# Altium PCB amigaDIP48_v0.8_skinny_willoe_2025-07-20.pcbdoc
Units mm, origin at the board's own origin, x right, y up, seen from the top; angles counter-clockwise.
Board outline 92.9 x 46.99 mm, 2 copper layers (Top Layer, Bottom Layer); 44 components, 81 nets, 277 pads, 151 vias.
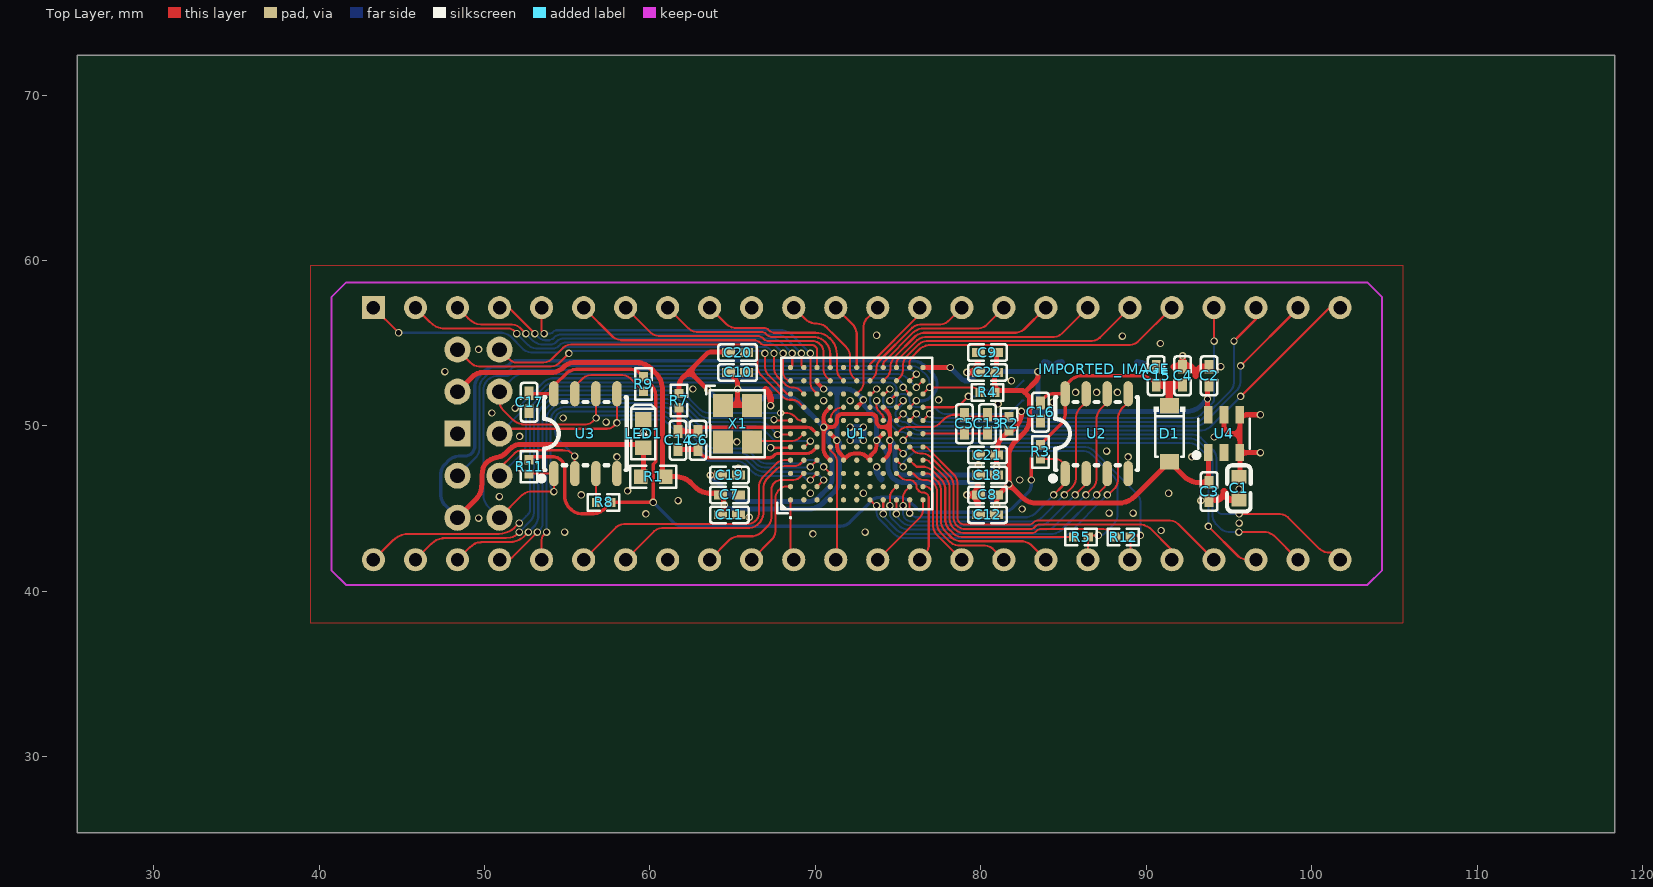
[diagram p0: Top Layer view]
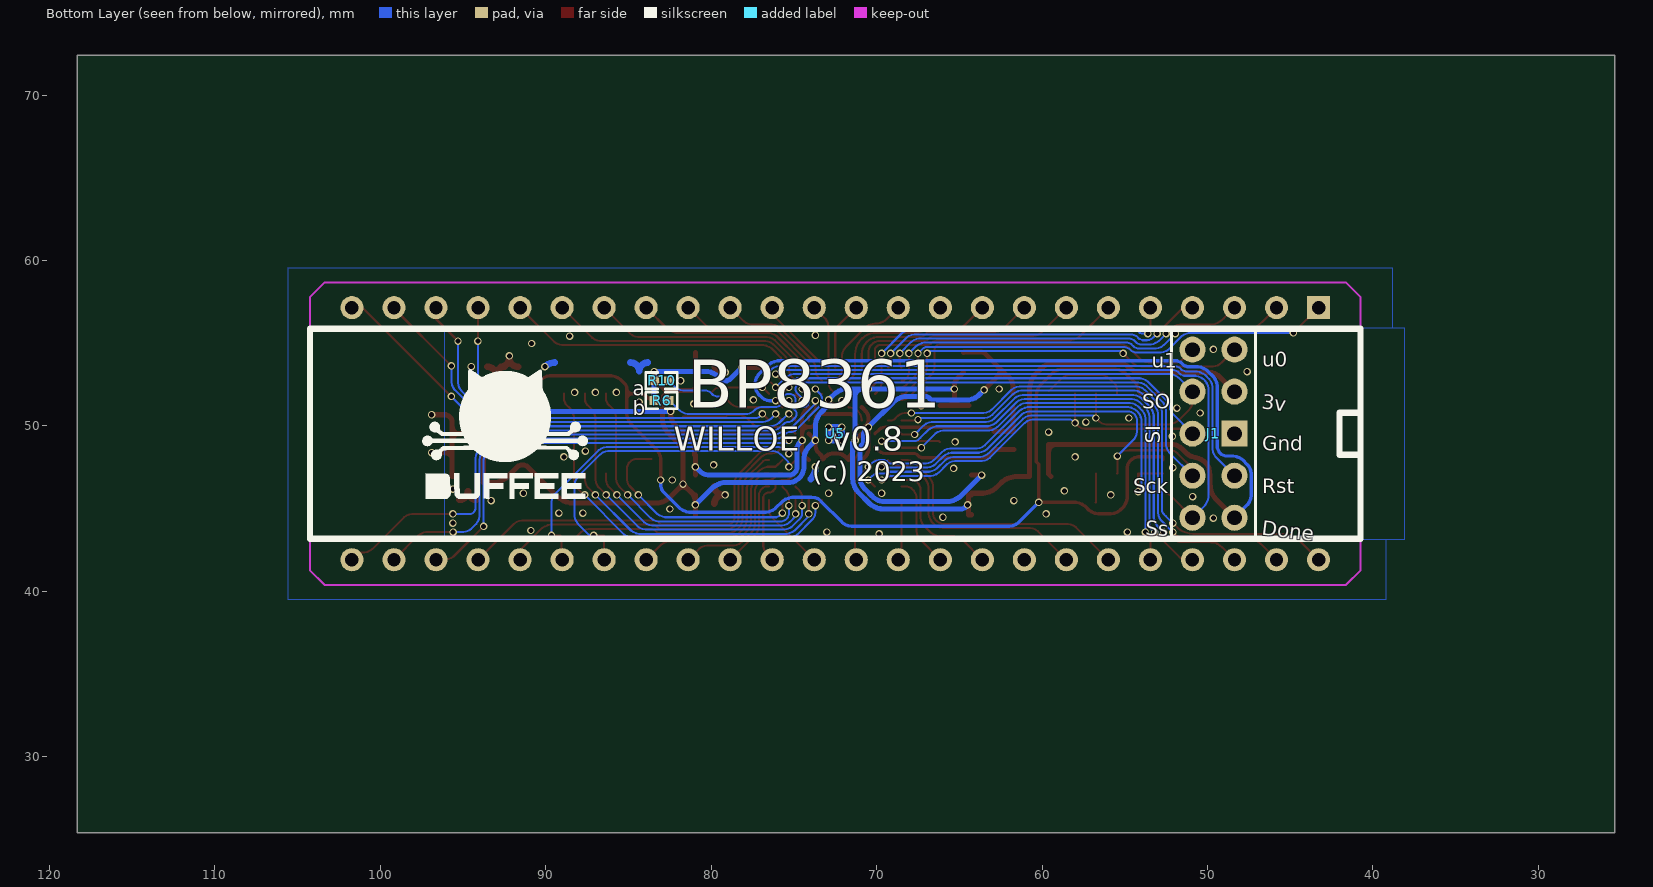
[diagram p1: Bottom Layer view, seen from below]

## Layer stack, top to bottom
Top Layer: signal copper (thickness not stored)
Dielectric: dielectric 0.32, FR-4, Dk 4.8
Bottom Layer: signal copper (thickness not stored)

## Board outline
118.3,25.4 25.4,25.4 25.4,72.39 118.3,72.39

## Components (designator, comment, footprint, x,y, rotation, side; value= is the part's Value field where it differs from the comment)
C1 "4.7u" C0603 95.6,46.23 r90 top
C2 "4.7u" C0402 93.8,53.03 r270 top
C3 "4.7u" C0402 93.8,46.03 r90 top
C4 "4.7u" C0402 92.2,53.03 r270 top
C5 "4.7u" C0402 79,50.13 r90 top
C6 "4.7u" C0402 62.9,49.13 r90 top
C7 "100n" C0402 64.8,45.83 r180 top
C8 "100n" C0402 80.4,45.83 r0 top
C9 "100n" C0402 80.4,54.43 r0 top
C10 "100n" C0402 65.3,53.23 r180 top
C11 "100n" C0402 64.8,44.63 r180 top
C12 "100n" C0402 80.4,44.63 r0 top
C13 "100n" C0402 80.4,50.13 r90 top
C14 "100n" C0402 61.7,49.13 r90 top
C15 "100n" C0402 90.6,53.03 r270 top
C16 "100n" C0402 83.6,50.83 r90 top
C17 "100n" C0402 52.7,51.43 r90 top
C18 "100n" C0402 80.4,47.03 r0 top
C19 "100n" C0402 64.8,47.03 r180 top
C20 "100n" C0402 65.3,54.43 r180 top
C21 "100n" C0402 80.4,48.23 r0 top
C22 "100n" C0402 80.4,53.23 r0 top
D1 "MBR130" SOD-123_L2.8-W1.8-LS3.7-RD 91.4,49.53 r270 top
IMPORTED_IMAGE "IMPORTED_IMAGE" IMPORTED_IMAGE 87.462,53.42 r0 top
J1 "HDR-M-2.54_2x5" HDR-M-2.54_2X5 49.64,49.53 r270 bottom
LED1 "LED-0603_R" LED0603_RED 59.6,49.53 r90 top
R1 "2K2" R0603 60.2,46.93 r0 top
R2 "100" R0402#1 81.7,50.13 r90 top
R3 "10K" R0402#1 83.6,48.43 r270 top
R4 "10K" R0402#1 80.4,52.03 r180 top
R5 "150K" R0402#1 86.05,43.28 r0 top
R6 "10K" R0402#2 83,51.53 r0 bottom
R7 "100" R0402#1 61.75,51.53 r270 top
R8 "10K" R0402#1 57.2,45.38 r180 top
R9 "10K" R0402#1 59.6,52.53 r270 top
R10 "10K" R0402#2 83,52.73 r0 bottom
R11 "10K" R0402#1 52.7,47.53 r270 top
R12 "150K" R0402#1 88.6,43.28 r0 top
U1 "ICE40HX8K-BG121" CABGA-121_L9.0-W9.0-R11-C11-P0.80-TL 72.5,49.53 r90 top
U2 "IS66WVS4M8BLL-104NLI" SOIC-8_L4.9-W3.9-P1.27-LS6.1-BL 87,49.53 r0 top
U3 "W25X40CLSNIG" SOIC-8_L4.9-W3.9-P1.27-LS6.1-BL 56.1,49.53 r0 top
U4 "AP7312-1233W6-7" SOT-26_L3.0-W1.6-P0.95-LS2.8-BR 94.7,49.53 r270 top
U5 "HDR-M-1.778_2x24_SDIP" DIP-48__600 72.5,49.53 r180 bottom
X1 "100MHz" OSC-SMD_4P-L3.2-W2.5-BL 65.3,50.13 r270 top

## Footprints (in the part's own frame and the unit in brackets; to place one, negate y for a bottom-side part, rotate by r counter-clockwise, add the part's x,y. Pads: shape width x height; smd on the part's side, far side on the other; paste and mask are expansions set on the pad)
C0402 [mm]
  rect 0.79x0.54 smd paste-100 mask+0.051: 1(-0.545,0) 2(0.545,0)
  silkscreen extent -1.17,-0.5 1.17,0.5
C0603 [mm]
  rect 0.8x0.9 smd paste+0 mask+0.051: 1(-0.7,0) 2(0.7,0)
  silkscreen extent -1.41,-0.71 1.39,0.72
CABGA-121_L9.0-W9.0-R11-C11-P0.80-TL [mm]
  round 0.32 smd paste-100 mask+0.051: A1(-4,4) A2(-3.2,4) A3(-2.4,4) A4(-1.6,4) A5(-0.8,4) A6(0,4) A7(0.8,4) A9(2.4,4) A10(3.2,4) A11(4,4) B1(-4,3.2) B2(-3.2,3.2) B3(-2.4,3.2) B4(-1.6,3.2) B5(-0.8,3.2) B6(0,3.2) B7(0.8,3.2) B8(1.6,3.2) B9(2.4,3.2) B10(3.2,3.2) B11(4,3.2) C1(-4,2.4) C2(-3.2,2.4) C3(-2.4,2.4) C4(-1.6,2.4) C5(-0.8,2.4) C6(0,2.4) C8(1.6,2.4) C9(2.4,2.4) C10(3.2,2.4) C11(4,2.4) D1(-4,1.6) D2(-3.2,1.6) D3(-2.4,1.6) D4(-1.6,1.6) D5(-0.8,1.6) D6(0,1.6) D7(0.8,1.6) D8(1.6,1.6) D9(2.4,1.6) D10(3.2,1.6) D11(4,1.6) E1(-4,0.8) E2(-3.2,0.8) E3(-2.4,0.8) E4(-1.6,0.8) E5(-0.8,0.8) E6(0,0.8) E7(0.8,0.8) E8(1.6,0.8) E9(2.4,0.8) E10(3.2,0.8) E11(4,0.8) F1(-4,0) F2(-3.2,0) F3(-2.4,0) F4(-1.6,0) F5(-0.8,0) F6(0,0) F7(0.8,0) F8(1.6,0) F9(2.4,0) F10(3.2,0) F11(4,0) G1(-4,-0.8) G2(-3.2,-0.8) G3(-2.4,-0.8) G4(-1.6,-0.8) G5(-0.8,-0.8) G6(0,-0.8) G7(0.8,-0.8) G8(1.6,-0.8) G9(2.4,-0.8) G10(3.2,-0.8) G11(4,-0.8) GMD(0.8,2.4) GMD(1.6,4) H1(-4,-1.6) H2(-3.2,-1.6) H3(-2.4,-1.6) H4(-1.6,-1.6) H5(-0.8,-1.6) H6(0,-1.6) H7(0.8,-1.6) H8(1.6,-1.6) H9(2.4,-1.6) H10(3.2,-1.6) H11(4,-1.6) J1(-4,-2.4) J2(-3.2,-2.4) J3(-2.4,-2.4) J4(-1.6,-2.4) J5(-0.8,-2.4) J6(0,-2.4) J7(0.8,-2.4) J8(1.6,-2.4) J9(2.4,-2.4) J10(3.2,-2.4) J11(4,-2.4) K1(-4,-3.2) K2(-3.2,-3.2) K3(-2.4,-3.2) K4(-1.6,-3.2) K5(-0.8,-3.2) K6(0,-3.2) K7(0.8,-3.2) K8(1.6,-3.2) K9(2.4,-3.2) K10(3.2,-3.2) K11(4,-3.2) L1(-4,-4) L2(-3.2,-4) L3(-2.4,-4) L4(-1.6,-4) L5(-0.8,-4) L6(0,-4) L7(0.8,-4) L8(1.6,-4) L9(2.4,-4) L10(3.2,-4) L11(4,-4)
  silkscreen extent -5.13,-4.58 4.58,4.8
DIP-48__600 [mil]
  rect 55x55 hole 32 paste+0 mask+2: 1(1150,300)
  round 55 hole 32 paste+0 mask+2: 2(1050,300) 3(950,300) 4(850,300) 5(750,300) 6(650,300) 7(550,300) 8(450,300) 9(350,300) 10(250,300) 11(150,300) 12(50,300) 13(-50,300) 14(-150,300) 15(-250,300) 16(-350,300) 17(-450,300) 18(-550,300) 19(-650,300) 20(-750,300) 21(-850,300) 22(-950,300) 23(-1050,300) 24(-1150,300) 25(-1150,-300) 26(-1050,-300) 27(-950,-300) 28(-850,-300) 29(-750,-300) 30(-650,-300) 31(-550,-300) 32(-450,-300) 33(-350,-300) 34(-250,-300) 35(-150,-300) 36(-50,-300) 37(50,-300) 38(150,-300) 39(250,-300) 40(350,-300) 41(450,-300) 42(550,-300) 43(650,-300) 44(750,-300) 45(850,-300) 46(950,-300) 47(1050,-300) 48(1150,-300)
  silkscreen extent -1250,-250 1250,250
HDR-M-2.54_2X5 [mil]
  round 62 hole 35 paste+0 mask+2: 1(200,50) 2(200,-50) 3(100,50) 4(100,-50) 6(0,-50) 7(-100,50) 8(-100,-50) 9(-200,50) 10(-200,-50)
  rect 62x62 hole 35 paste+0 mask+2: 5(0,50)
  silkscreen extent -250,-100 250,100
IMPORTED_IMAGE [mm]
LED0603_RED [mm]
  rect 0.9x1 smd paste+0 mask+0.051: 1(-0.85,0) 2(0.85,0)
  silkscreen extent -1.54,-0.73 1.75,0.73
OSC-SMD_4P-L3.2-W2.5-BL [mm]
  rect 1.4x1.2 smd paste+0 mask+0.051: 1(-1.1,-0.875) 2(1.1,-0.875) 3(1.1,0.875) 4(-1.1,0.875)
  silkscreen extent -2.29,-1.9 2.03,1.65
R0402#1 [mm]
  rect 0.566x0.54 smd paste-100 mask+0.051: 1(-0.433,0) 2(0.433,0)
  silkscreen extent -0.94,-0.5 0.94,0.5
R0402#2 [mm]
  rect 0.566x0.54 smd paste-100 mask+0.051: 1(0.433,0) 2(-0.433,0)
  silkscreen extent -0.94,-0.5 0.94,0.5
R0603 [mm]
  rect 0.806x0.864 smd paste-100 mask+0.051: 1(-0.753,0) 2(0.753,0)
  silkscreen extent -1.39,-0.66 1.39,0.66
SOD-123_L2.8-W1.8-LS3.7-RD [mm]
  rect 0.95x1.15 smd paste+0 mask+0.051: 1(-1.693,0) 2(1.693,0)
  silkscreen extent -1.63,-0.94 1.41,0.94
SOIC-8_L4.9-W3.9-P1.27-LS6.1-BL [mil]
  oval 22.38x60 smd paste+0 mask+2: 1(-75,-95) 2(-25,-95) 3(25,-95) 4(75,-95) 5(75,95) 6(25,95) 7(-25,95) 8(-75,95)
  silkscreen extent -110,-112 98,87
SOT-26_L3.0-W1.6-P0.95-LS2.8-BR [mm]
  rect 1.04x0.532 smd paste+0 mask+0.051: 1(1.145,-0.95) 2(1.145,0) 3(1.145,0.95) 4(-1.145,0.95) 5(-1.145,0) 6(-1.145,-0.95)
  silkscreen extent -0.9,-1.82 1.45,1.56

## Via types
v1: diameter 0.45, hole 0.305, Top Layer to Bottom Layer, tented both sides, 151 vias

## Nets (pads, with @x,y where several pads share a name; then routed paths per layer and width w, separated by ;. In a path a pad name is that pad's centre, name@x,y a point inside that pad or via, vN(x,y) a via of type N, cw(c..) or ccw(c..) an arc to the next point about the centre after c; other vN are vias at no path point)
+1.2VDC: C2.2 C18.2 C19.2 C20.2 C21.2 R2.1 R7.1 U1.D4 U1.D8 U1.H4 U1.H8 U4.6 | length 68.5
  Top Layer w0.25: 70.501,49.552 cw(c70.878,49.552) 70.878,49.929 cw(c70.878,50.306) 70.501,50.306 ; U1.D4 70.653,48.178 70.578,48.29 70.527,48.415 70.501,48.547 v1(70.501,49.929) ; U1.D8 70.653,50.882 70.578,50.77 70.527,50.645 70.501,50.513 v1(70.501,49.929) ; U1.H4 74.347,48.177 74.422,48.289 74.474,48.413 74.5,48.545 v1(74.5,49.13) 74.5,49.929 ; U1.H8 74.347,50.883 74.422,50.771 74.474,50.647 74.5,50.515 74.5,49.929 ; 74.5,49.552 ccw(c74.123,49.552) 74.123,49.929 ccw(c74.123,50.306) 74.5,50.306 ; v1(70.501,49.929) 71.027,49.929 71.152,49.981 71.249,50.077 71.301,50.203 71.301,50.458 71.352,50.582 71.448,50.677 71.572,50.729 73.428,50.729 73.552,50.677 73.647,50.582 73.699,50.458 73.699,50.203 73.751,50.077 73.847,49.981 73.973,49.929 74.5,49.929
  Top Layer w0.305: R7.1 61.751,52.407 61.784,52.574 61.849,52.731 61.943,52.873 62.375,53.305 ; 62.07,52.999 cw(c62.375,52.694) 62.68,53 ; 62.68,53 cw(c62.986,53.305) 62.68,53.61 ; v1(63.5,52.18) 62.375,53.305 ; v1(63.65,47.03) C19.2 ; C20.2 64.705,54.481 64.049,54.481 63.679,54.481 63.457,54.389 62.375,53.305 ; C18.2 C21.2 80.999,48.23 80.999,48.704 81.034,48.883 81.104,49.052 81.205,49.203 R2.1 81.87,49.698 82.048,49.876 82.195,50.038 82.37,50.338 82.457,50.634 v1@82.449,50.879 ; U4.6 93.699,50.724 93.699,51.631 93.699,52.385 C2.2
  Bottom Layer w0.305: v1(63.5,52.18) 63.872,51.808 64.039,51.696 64.225,51.619 64.423,51.58 66.645,51.58 66.771,51.632 66.867,51.728 66.993,51.781 68.175,51.781 68.302,51.768 68.427,51.743 68.549,51.706 68.667,51.657 68.78,51.597 68.886,51.526 68.984,51.446 v1(70.501,49.929) 70.723,49.707 70.801,49.519 70.801,49.004 70.852,48.879 70.947,48.782 70.999,48.657 70.999,46.953 71.001,46.812 70.994,46.703 70.96,46.574 70.901,46.457 70.826,46.33 70.757,46.243 70.664,46.145 70.285,45.766 70.201,45.68 70.103,45.611 70.011,45.549 69.909,45.505 69.782,45.46 69.628,45.433 69.476,45.431 65.724,45.431 65.598,45.443 65.473,45.468 65.351,45.505 65.233,45.554 65.12,45.614 65.014,45.685 64.916,45.766 v1(63.65,47.03) ; v1@74.499,49.129 74.723,48.907 74.801,48.718 74.801,47.441 74.879,47.253 75.023,47.109 75.211,47.031 80.18,47.031 80.345,47.064 80.501,47.128 80.641,47.221 v1(80.95,47.53) ; v1(82.45,50.88) 92.546,50.88 92.793,50.929 93.026,51.026 93.236,51.166 v1(93.7,51.63)
+3.0VDC: C4.2 C15.2 C16.2 C17.2 D1.1 R3.1 R8.1 R9.1 R11.1 U2.8 U3.8 | length 72.1
  Top Layer w0.203: R11.1 52.701,48.131 54.204,48.131 54.41,48.085 54.575,47.982 54.671,47.896 54.78,47.757 54.829,47.636 54.842,47.506 54.849,47.373 54.849,45.664 54.89,45.459 54.97,45.266 55.087,45.092 55.262,44.918 55.436,44.802 55.63,44.722 55.835,44.681 56.597,44.681 56.802,44.722 56.996,44.802 57.17,44.918 57.396,45.143 57.57,45.259 57.763,45.339 57.968,45.38 60.199,45.38 60.201,47.681 60.351,47.831 60.351,51.875 60.31,52.08 60.23,52.273 60.114,52.447 59.599,52.962 59.31,53.251 59.179,53.338 59.034,53.398 58.88,53.429 55.535,53.429 55.33,53.388 55.137,53.308 54.963,53.192 54.283,52.514 54.194,52.3 54.194,52.084 54.053,51.943 52.701,51.943 C17.2 ; 59.869,45.38 ccw(c59.869,45.71) 60.199,45.71 ; v1(83.05,46.73) 83.051,48.018 83.087,48.199 83.158,48.369 83.26,48.523 R3.1 84.859,50.121 84.975,50.295 85.055,50.488 85.096,50.693 U2.8 ; C16.2 83.6,51.481 83.886,51.767 84.015,51.853 84.159,51.913 84.311,51.943 U2.8 ; U2.8@85.096,51.613 ccw(c84.766,51.613) 84.766,51.943 ccw(c84.766,52.273) U2.8@85.096,52.273 ; C15.2 90.262,52.822 90.109,52.924 89.94,52.994 89.759,53.03 86.026,53.03 85.827,52.991 85.639,52.913 85.47,52.8 85.184,52.514 85.096,52.3 U2.8
  Top Layer w0.457: C15.2 91.4,52.484 ; C15.2@90.816,52.484 cw(c90.816,51.9) 91.4,51.9 cw(c91.984,51.9) C4.2@91.984,52.484 ; D1.1 91.4,52.484 ; C4.2 91.4,52.484
  Bottom Layer w0.203: v1(60.2,45.38) 61.412,44.167 61.586,44.05 61.779,43.97 61.984,43.929 71.514,43.929 71.72,43.97 71.913,44.05 72.087,44.166 73.363,45.442 73.537,45.597 73.698,45.655 73.935,45.679 75.114,45.679 75.319,45.639 75.512,45.559 75.686,45.443 76.113,45.017 76.287,44.901 76.481,44.821 76.686,44.78 81.314,44.78 81.519,44.821 81.712,44.901 81.886,45.017 82.902,46.031 82.975,46.14 83.025,46.261 83.051,46.39 v1(83.05,46.73)
+3.3VDC: C3.2 C7.2 C8.2 C9.2 C10.2 C11.2 C12.2 C22.2 D1.2 J1.7 R1.2 R4.1 R6.1 R10.1 U1.C10 U1.D6 U1.E4 U1.F8 U1.G4 U1.H6 U1.L11 U4.1 X1.1 X1.4 | length 117.3
  Top Layer w0.25: U1.C10 70.1,52.63 v1(70.5,52.23) ; U1.D6 71.148,49.283 71.223,49.172 71.275,49.048 71.301,48.916 71.301,48.745 71.327,48.613 71.378,48.488 71.453,48.376 71.7,48.128 U1.E4 71.948,48.178 72.06,48.253 72.185,48.305 72.317,48.331 72.686,48.331 72.817,48.305 72.942,48.253 73.053,48.178 73.254,47.976 73.3,47.995 73.3,48.116 73.346,48.227 73.55,48.421 73.643,48.565 73.673,48.659 73.699,48.788 73.699,48.919 73.724,49.047 73.774,49.168 73.847,49.277 U1.H6 ; U1.F8 72.9,51.53 v1(72.9,51.58)
  Top Layer w0.305: J1.7 49.335,53.035 49.539,53.162 49.74,53.214 49.877,53.231 54.128,53.231 54.325,53.27 54.511,53.347 54.679,53.459 54.822,53.602 54.989,53.714 55.175,53.791 55.373,53.83 59.227,53.83 59.354,53.818 59.479,53.793 59.601,53.756 59.719,53.707 59.831,53.647 59.937,53.576 60.035,53.495 60.415,53.114 60.496,53.016 60.567,52.909 60.627,52.797 60.676,52.679 60.712,52.557 60.737,52.432 60.75,52.305 60.75,46.929 R1.2 61.627,46.929 61.754,46.917 61.879,46.892 62.001,46.855 62.119,46.806 62.232,46.746 62.338,46.675 62.436,46.594 62.764,46.266 62.863,46.185 62.969,46.114 63.081,46.054 63.199,46.005 63.321,45.968 63.446,45.943 63.573,45.931 64.255,45.931 C7.2 64.451,45.829 64.451,44.63 C11.2 ; C10.2 65.215,52.771 65.299,52.568 65.299,52.23 65.299,51.229 ; X1.1@64.867,51.229 ccw(c64.867,51.661) 65.299,51.661 ccw(c65.731,51.661) X1.4@65.731,51.229 ; U1.L11 v1(78.15,53.53) ; R4.1 R4.1@80.834,52.131 ; 80.834,52.563 ccw(c81.265,52.563) 81.265,52.131 ; C12.2 v1@80.945,45.225 ; v1@80.945,45.235 C8.2 ; C9.2 C22.2 80.834,53.117 R4.1@80.834,52.131 ; v1(80.95,45.23) 80.95,45.73 v1(81.7,46.48) ; v1@80.95,45.388 cw(c81.777,45.388) C8.2@81.193,45.972 ; 81.394,46.174 cw(c81.7,45.869) 82.005,46.174 ; 81.458,46.237 ccw(c80.873,46.822) 81.7,46.822 ccw(c82.527,46.822) 81.942,46.237 ; v1(83.45,53.28) 83.45,52.947 83.367,52.747 82.651,52.03 ; 93.318,46.581 ccw(c93.318,47.013) 93.749,47.013 ; C3.2@93.749,46.576 C3.2 ; U4.1 93.749,46.581 93.131,46.581 93.004,46.594 92.879,46.618 92.757,46.656 92.639,46.704 92.527,46.764 92.421,46.835 92.322,46.916 91.675,47.563 91.5,47.636 91.31,47.636 91.135,47.563 89.335,45.763 89.158,45.619 88.968,45.494 88.759,45.406 88.52,45.354 88.283,45.329 83.324,45.329 83.197,45.341 83.072,45.366 82.95,45.403 82.832,45.452 82.72,45.512 82.614,45.583 82.515,45.664 v1(81.7,46.48) ; 65.299,51.229 X1.4 X1.1 65.299,51.229 ; R4.1@80.834,52.131 82.551,52.131 82.651,52.03 ; v1(81.7,46.48) 81.7,48.205 81.712,48.332 81.737,48.457 81.774,48.579 81.823,48.697 81.883,48.81 81.954,48.916 82.035,49.014 82.614,49.594 82.695,49.692 82.766,49.798 82.826,49.911 82.875,50.029 82.912,50.151 82.937,50.276 82.949,50.403 82.949,51.62 82.872,51.808 82.651,52.03
  Bottom Layer w0.305: v1@64.499,45.23 64.685,45.046 64.842,44.981 69.626,44.981 69.753,44.993 69.878,45.018 70,45.055 70.118,45.104 70.23,45.164 70.336,45.235 70.435,45.316 71.116,45.995 71.196,46.093 71.267,46.199 71.328,46.312 71.376,46.43 71.413,46.552 71.438,46.677 71.451,46.803 71.451,48.981 v1(71.301,49.131) 71.301,52.229 ; v1(65.3,52.23) 71.3,52.23 71.899,52.23 72.114,52.187 72.316,52.104 72.498,51.982 72.846,51.634 72.901,51.501 72.901,51.358 72.956,51.225 73.364,50.816 73.445,50.717 73.516,50.611 73.576,50.498 73.624,50.38 73.661,50.258 73.686,50.133 73.699,50.006 v1(73.699,49.129) 74.133,48.695 74.264,48.499 74.354,48.281 74.4,48.05 74.4,47.426 74.436,47.245 74.507,47.074 74.609,46.92 74.74,46.79 74.894,46.687 75.065,46.616 75.246,46.58 79.126,46.58 79.253,46.567 79.378,46.543 79.5,46.506 79.618,46.457 79.73,46.397 79.836,46.326 79.935,46.245 v1(80.95,45.23) ; 70.869,52.23 cw(c70.869,51.798) 71.301,51.798 cw(c71.733,51.798) 71.733,52.23 ; 73.699,49.471 ccw(c74.526,49.471) 73.941,48.887 ; v1(78.15,53.53) 78.876,52.803 79.054,52.73 79.246,52.73 79.423,52.803 79.69,53.07 79.843,53.172 80.014,53.243 80.195,53.279 83.294,53.279 83.45,53.124 R10.1@83.45,52.748 ; R6.1@83.432,51.529 83.45,51.547 R10.1@83.45,52.748 ; R10.1@83.432,52.73 R10.1@83.45,52.748
  other v1: 64.5,45.23
+5.0VDC: C1.2 U4.3 U4.4 U4.5 U5.10 | length 10.7
  Top Layer w0.305: U4.5 94.699,49.941 94.778,49.751 94.923,49.606 95.113,49.528 95.649,49.528 ; C1.2@95.599,46.929 95.649,46.929 U4.3 ; U4.3@95.649,47.953 cw(c96.081,47.953) 96.081,48.385 cw(c96.081,48.816) U4.3@95.649,48.816 ; 95.649,49.096 ccw(c95.218,49.096) 95.218,49.528 ccw(c95.218,49.959) 95.649,49.959 ; v1@96.899,48.385 U4.3 ; v1@96.899,50.676 96.032,50.676 95.856,50.603 95.722,50.469 95.649,50.294 95.649,49.528 ; U4.3 95.649,49.528
  other v1: 96.9,48.385 96.9,50.675
CBSEL0: R10.2 U1.L8 | length 6.6
  Top Layer w0.125: U1.L8 78.322,51.13 78.492,51.164 78.652,51.23 78.796,51.326 v1(79.25,51.78)
  Bottom Layer w0.125: v1(79.25,51.78) 79.671,51.781 79.891,51.872 80.059,52.04 80.279,52.131 81.689,52.131 81.859,52.165 82.019,52.231 82.163,52.328 R10.2@82.566,52.73
CBSEL1: R6.2 U1.H9 | length 11.5
  Top Layer w0.125: U1.H9 74.2,51.93 v1(74.5,52.23)
  Bottom Layer w0.125: v1@74.499,52.23 74.192,51.923 74.1,51.701 74.1,51.405 74.152,51.279 74.249,51.182 74.374,51.13 74.626,51.13 74.752,51.182 74.848,51.279 74.9,51.405 74.9,51.656 74.952,51.782 75.049,51.878 75.175,51.93 75.426,51.93 75.552,51.878 75.648,51.782 75.7,51.656 75.7,51.47 75.765,51.315 75.884,51.195 76.041,51.13 76.983,51.13 77.115,51.104 77.24,51.052 77.352,50.977 77.447,50.882 77.559,50.807 77.684,50.755 77.816,50.729 81.422,50.729 81.592,50.763 81.752,50.829 81.896,50.925 82.5,51.529 R6.2@82.566,51.529
CDONE: J1.1 LED1.1 R1.1 U1.K8 | length 57.8
  Top Layer w0.125: U1.K8 v1(76.1,51.53)
  Top Layer w0.305: J1.1 49.49,45.57 49.611,45.72 49.714,45.882 49.785,46.06 49.83,46.303 49.851,46.531 49.851,47.036 49.868,47.222 49.903,47.412 49.969,47.571 50.066,47.713 50.187,47.834 50.378,47.964 50.513,48.025 50.73,48.08 50.941,48.141 51.058,48.194 51.166,48.265 51.266,48.347 51.528,48.609 51.647,48.707 51.775,48.791 51.916,48.846 52.066,48.868 52.218,48.88 59.599,48.88 59.599,48.679 59.599,47.084 R1.1 ; LED1.1@59.167,48.88 cw(c59.167,48.448) LED1.1@59.599,48.448
  Bottom Layer w0.203: J1.1 47.586,45.234 47.47,45.408 47.39,45.601 47.349,45.806 47.349,47.094 47.39,47.299 47.47,47.493 47.586,47.667 47.861,47.942 48.035,48.058 48.228,48.138 48.433,48.179 48.918,48.179 49.14,48.271 49.309,48.44 49.401,48.662 49.401,52.395 49.442,52.6 49.522,52.794 49.638,52.968 50.012,53.342 50.186,53.458 50.38,53.538 50.585,53.579 51.22,53.579 51.44,53.67 51.609,53.838 51.829,53.929 75.964,53.929 76.17,53.889 76.363,53.809 76.537,53.692 77.147,53.082 77.246,52.934 77.314,52.77 77.349,52.595 77.349,52.417 77.314,52.242 77.246,52.077 77.147,51.929 76.924,51.705 76.796,51.619 76.653,51.559 76.501,51.529 v1@76.099,51.529
CRESET_B: J1.3 R4.2 U1.L9 | length 38.6
  Top Layer w0.125: U1.L9 76.899,52.329 79.558,52.329 79.746,52.251 R4.2 ; v1@76.747,52.177 cw(c77.115,51.809) v1@77.115,52.329
  Bottom Layer w0.125: J1.3 49.504,48.125 49.601,48.269 49.667,48.429 49.701,48.599 49.701,52.351 49.735,52.521 49.801,52.681 49.897,52.825 50.155,53.083 50.299,53.179 50.459,53.245 50.629,53.279 51.322,53.279 51.541,53.37 51.708,53.539 51.927,53.63 75.872,53.63 76.042,53.596 76.202,53.529 76.346,53.433 76.751,53.029 76.823,52.92 76.874,52.799 76.899,52.67 v1@76.899,52.329
  other v1: 76.9,52.33
DAT0: U1.G1 U2.5 | length 23.2
  Top Layer w0.125: U1.G1 73.649,45.18 v1(73.7,45.18) ; v1(87.65,45.83) 87.699,45.829 88.105,46.235 88.201,46.379 88.267,46.539 88.301,46.709 88.301,50.55 88.335,50.72 88.401,50.881 88.497,51.025 88.813,51.342 88.906,51.567 U2.5
  Bottom Layer w0.125: v1(73.7,45.18) 73.701,44.777 73.712,44.628 73.775,44.475 73.877,44.354 74.803,43.427 74.947,43.331 75.107,43.265 75.277,43.231 84.772,43.231 84.942,43.265 85.102,43.331 85.247,43.427 v1(87.65,45.83)
DAT1: U1.J1 U2.2 | length 14.3
  Top Layer w0.125: v1(74.9,44.68) U1.J1 ; v1(85.7,45.83) 86.198,46.327 86.28,46.45 86.337,46.587 86.366,46.732 U2.2
  Bottom Layer w0.125: v1(74.9,44.68) 74.9,44.529 75.252,44.177 75.396,44.08 75.557,44.014 75.727,43.98 83.573,43.98 83.743,44.014 83.903,44.08 84.048,44.177 v1(85.7,45.83)
DAT2: U1.H1 U2.3 | length 16.8
  Top Layer w0.125: v1(74.1,44.68) U1.H1 ; v1(87,45.83) 87.46,46.288 87.546,46.417 87.605,46.561 87.636,46.713 U2.3
  Bottom Layer w0.125: v1(74.1,44.68) 74.1,44.529 74.953,43.676 75.097,43.58 75.257,43.514 75.427,43.48 84.371,43.48 84.541,43.514 84.701,43.58 84.845,43.676 v1(87,45.83)
DAT3: U1.K2 U2.7 | length 19
  Top Layer w0.125: v1(75.3,45.18) 75.3,45.714 75.326,45.846 75.378,45.97 75.452,46.082 U1.K2 ; v1(85.05,45.83) 85.555,46.334 85.651,46.478 85.717,46.638 85.751,46.808 85.751,50.553 85.785,50.723 85.851,50.883 85.948,51.027 86.274,51.354 86.366,51.575 U2.7
  Bottom Layer w0.125: v1@75.299,45.179 75.299,44.639 75.371,44.454 75.523,44.307 75.712,44.229 83.172,44.229 83.342,44.263 83.502,44.329 83.646,44.426 v1(85.05,45.83)
DAT_CLK: U1.J2 U2.6 | length 21.4
  Top Layer w0.125: v1(74.5,45.18) 74.5,45.714 74.526,45.846 74.578,45.97 74.652,46.082 U1.J2 ; v1(86.35,45.83) 86.804,46.283 86.901,46.427 86.967,46.587 87.001,46.757 87.001,50.502 87.035,50.672 87.101,50.832 87.197,50.976 87.493,51.272 87.563,51.377 87.611,51.493 87.636,51.616 U2.6
  Bottom Layer w0.125: v1@74.499,45.179 74.499,44.777 74.516,44.602 74.572,44.476 74.674,44.354 75.102,43.927 75.246,43.831 75.407,43.765 75.577,43.731 83.972,43.731 84.142,43.765 84.302,43.831 84.447,43.928 v1(86.35,45.83)
DAT_EN: R3.2 U1.K1 U2.1 | length 13.8
  Top Layer w0.125: v1(75.7,44.73) U1.K1 ; R3.2 84.599,47.998 84.827,47.904 85.001,47.73 85.096,47.502 U2.1 85.096,46.751 85.068,46.613 85.014,46.483 84.936,46.366 v1(84.4,45.83)
  Bottom Layer w0.125: v1(75.7,44.73) 75.884,44.545 76.041,44.481 82.773,44.481 82.943,44.514 83.103,44.581 83.248,44.677 v1(84.4,45.83)
GND: C1.1 C2.1 C3.1 C4.1 C7.1 C8.1 C9.1 C10.1 C11.1 C12.1 C15.1 C16.1 C17.1 C18.1 C19.1 C20.1 C21.1 C22.1 J1.5 LED1.2 U1.B1 U1.B2 U1.C1 U1.C8 U1.D1 U1.D2 U1.D7 U1.D9 U1.E1 U1.E2 U1.E3 U1.E5 U1.E6 U1.E7 U1.E8 U1.E9 U1.F1 U1.F2 U1.F3 U1.F4 U1.F5 U1.F6 U1.F7 U1.G2 U1.G3 U1.G5 U1.G6 U1.G7 U1.GMD U1.H2 U1.H3 U1.H5 U2.4 U3.4 U4.2 U5.41 X1.2 | length 15
  Top Layer w0.127: U1.D7 cw(c71.7,50.33) U1.E8
  Top Layer w0.4: 67.011,52.218 cw(c66.31,51.518) 67.3,51.518 ; v1@79.279,53.231 ccw(c79.279,53.758) 79.806,53.758 ; 79.806,45.302 ccw(c79.279,45.302) 79.279,45.829 ccw(c79.279,46.356) 79.806,46.356 ; 91.673,53.576 ccw(c91.673,54.103) 92.2,54.103 ccw(c92.727,54.103) 92.727,53.576 ; 92.473,53.576 cw(c92.473,53.049) 93,53.049 cw(c93.527,53.049) 93.527,53.576 ; 94.172,45.53 ccw(c94.172,46.057) 94.699,46.057 ccw(c95.226,46.057) C1.1@95.226,45.53
  Bottom Layer w0.4: 72.484,49.13 cw(c72.484,49.514) 72.1,49.514 cw(c72.516,49.514) 72.516,49.93 ; 72.532,49.93 cw(c72.532,49.562) 72.9,49.562 ; 72.563,49.13 ccw(c72.563,49.466) 72.9,49.466 ; v1@73.7,47.49 ccw(c74.689,47.49) 73.99,46.79 ; 83.822,53.83 cw(c83.822,53.303) 84.349,53.303 cw(c84.876,53.303) 84.876,53.83 ; 89.446,53.83 cw(c89.446,52.976) v1(90.05,53.58)
  other v1: 69.85,43.48 54.85,43.58 73,43.58 90.9,43.68 95.606,44.129 49.65,44.43 66,44.48 59.75,44.68 87.75,44.73 89.204,44.729 82.5,44.98 61.7,45.48 93.3,45.48 50.9,45.73 55.85,45.83 79.15,45.83 69.7,45.93 72.9,45.93 91.35,45.93 58.65,46.08 95.606,46.179 82.35,46.73 65.35,47.43 52.102,47.479 73.7,47.53 79.855,47.643 58,48.13 88.9,48.13 92.749,48.131 87.6,48.48 65.25,49.03 72.1,49.13 72.9,49.13 94.1,49.33 52.12,49.369 59.6,49.63 72.1,49.93 72.9,49.93 57.35,50.23 54.75,50.48 50.45,50.78 51.85,51.08 67.3,51.23 81.05,51.33 84.35,51.43 70.5,51.53 72.1,51.53 77.45,51.58 85.725,52.03 87,52.03 88.25,52.03 62.6,52.23 81.85,52.73 79.15,53.23 47.6,53.28 94.5,53.58 92.2,54.23 49.644,54.631 90.85,54.98 88.55,55.43 73.7,55.48
GNDPLL0: C5.1 C13.1 U1.L6 | length 3.9
  Top Layer w0.125: U1.L6 80.346,49.53 C13.1@80.399,49.586
GNDPLL1: C6.1 C14.1 U1.C5 | length 8.9
  Top Layer w0.203: C6.1 62.901,48.481 63.148,48.233 63.26,48.158 63.384,48.106 63.516,48.08 67.256,48.08 67.414,48.145 67.535,48.266 67.693,48.331 69.486,48.331 69.617,48.357 69.741,48.409 69.853,48.483 U1.C5
  Top Layer w0.305: C14.1 C6.1
ICE_CLK: U1.B6 X1.3 | length 3.3
  Top Layer w0.127: X1.3 66.226,49.08 68.608,49.08 68.756,49.11 68.896,49.168 69.021,49.252 U1.B6
ICE_MISO: J1.6 U1.C3 U1.K9 U3.5 | length 50.2
  Top Layer w0.125: J1.6@50.9,49.629 50.9,49.83 57.394,49.83 57.58,49.845 57.786,49.964 57.999,50.18 57.999,51.938 U3.5@58.004,51.943 ; v1@57.848,50.027 ccw(c57.475,50.395) v1@57.999,50.395 ; v1(69.7,46.73) U1.C3 ; v1(75.3,52.33) U1.K9
  Bottom Layer w0.125: J1.6 52.166,50.787 52.251,50.991 52.251,51.211 52.335,51.415 53.604,52.684 53.748,52.78 53.908,52.847 54.078,52.88 74.82,52.88 75.04,52.789 75.299,52.53 v1@75.299,52.329 ; v1@57.999,50.18 58.148,50.329 58.273,50.381 60.571,50.381 60.741,50.347 60.901,50.281 61.045,50.184 63.154,48.076 63.298,47.979 63.459,47.913 63.629,47.879 65.273,47.879 65.443,47.845 65.603,47.779 65.747,47.683 66.253,47.176 66.397,47.08 66.557,47.014 66.727,46.98 69.16,46.98 69.316,46.915 69.5,46.731 v1(69.7,46.73)
  other v1: 58,50.18
ICE_MOSI: J1.4 U1.C4 U1.J9 U3.2 | length 56.7
  Top Layer w0.125: J1.4@50.91,46.98 50.91,47.44 51.827,48.357 52.02,48.484 52.259,48.529 54.713,48.529 54.863,48.518 55.086,48.484 55.286,48.344 v1(55.45,48.18) 55.451,47.13 U3.2@55.464,47.117 ; J1.4@50.91,47.224 cw(c51.43,47.224) J1.4@51.062,47.592 ; v1(69.7,47.53) U1.C4 ; v1(74.5,51.53) U1.J9
  Bottom Layer w0.125: J1.4@50.91,46.98 52.303,48.373 52.4,48.518 52.466,48.678 52.5,48.848 52.5,50.951 52.534,51.121 52.6,51.282 52.696,51.426 53.703,52.432 53.847,52.529 54.007,52.595 54.177,52.629 74.557,52.629 74.714,52.564 74.845,52.435 74.9,52.302 74.9,52.158 74.845,52.025 74.499,51.679 v1@74.499,51.529 ; v1@55.449,48.179 54.446,49.185 54.349,49.327 54.283,49.487 54.25,49.657 54.25,50.401 54.282,50.495 54.341,50.622 54.407,50.698 54.509,50.787 54.613,50.843 54.73,50.879 60.773,50.879 60.943,50.846 61.103,50.78 61.245,50.683 63.353,48.575 63.496,48.479 63.656,48.412 63.826,48.379 65.474,48.379 65.644,48.346 65.804,48.28 65.947,48.184 66.455,47.676 66.597,47.579 66.757,47.513 66.927,47.48 69.65,47.48 v1(69.7,47.53)
ICE_SCK: J1.8 U1.C2 U1.L10 U3.6 | length 51.4
  Top Layer w0.125: J1.8@50.91,52.08 50.91,51.449 50.944,51.279 51.01,51.119 51.106,50.974 51.622,50.459 51.774,50.333 51.949,50.213 52.103,50.144 52.267,50.102 52.436,50.081 56.003,50.081 56.134,50.09 56.267,50.108 56.382,50.154 56.533,50.264 56.749,50.48 56.749,51.928 U3.6@56.734,51.943 ; v1@56.597,50.328 ccw(c56.229,50.695) v1@56.749,50.695 ; U1.C2 v1(70.5,46.73) ; v1(76.1,52.33) U1.L10
  Bottom Layer w0.125: J1.8 51.773,52.933 51.917,53.029 52.077,53.095 52.247,53.129 75.021,53.129 75.191,53.095 75.351,53.029 75.495,52.933 v1@76.099,52.329 ; v1(56.75,50.48) 56.9,50.63 60.672,50.63 60.842,50.596 61.002,50.53 61.146,50.433 63.253,48.326 63.398,48.23 63.558,48.164 63.728,48.13 65.372,48.13 65.542,48.096 65.702,48.03 65.847,47.933 66.353,47.426 66.498,47.33 66.658,47.264 66.828,47.23 69.35,47.23 69.45,47.13 69.884,47.13 70.016,47.104 70.14,47.052 70.252,46.978 v1(70.5,46.73)
ICE_SS: J1.2 R11.2 U1.D3 U1.K10 U3.1 | length 66.1
  Top Layer w0.125: J1.2 52.293,45.833 52.437,45.93 52.598,45.996 52.768,46.03 54.199,46.03 U3.1@54.199,47.112 ; R11.2@52.701,47.117 U3.1@54.194,47.117 ; 53.947,46.03 ccw(c53.947,46.282) 54.199,46.282 ; U3.1@53.947,47.117 cw(c53.947,46.865) U3.1@54.199,46.865 ; v1(70.5,47.53) U1.D3 ; U1.K10 v1@76.099,53.129
  Bottom Layer w0.125: J1.2 50.146,45.214 50.05,45.358 49.984,45.518 49.95,45.688 49.95,52.26 49.983,52.425 50.047,52.581 50.14,52.721 50.259,52.839 50.399,52.933 50.555,52.997 50.72,53.03 51.421,53.03 51.641,53.121 51.809,53.29 52.029,53.381 75.758,53.381 75.915,53.315 v1@76.099,53.129 ; v1@54.199,46.03 54.052,46.178 54.001,46.304 54.001,50.361 54.034,50.526 54.098,50.681 54.191,50.821 54.309,50.94 54.448,51.033 54.603,51.097 54.768,51.13 60.871,51.13 61.041,51.096 61.201,51.03 61.345,50.934 63.454,48.827 63.598,48.731 63.758,48.665 63.928,48.631 65.57,48.631 65.74,48.597 65.9,48.531 66.044,48.434 66.551,47.926 66.695,47.83 66.855,47.763 67.025,47.729 69.178,47.729 69.303,47.781 69.398,47.878 69.523,47.93 69.884,47.93 70.016,47.904 70.14,47.852 70.252,47.778 v1(70.5,47.53)
  other v1: 54.2,46.03 76.1,53.13
PIN1: U1.B9 U5.1 | length 28.9
  Top Layer w0.125: U5.1 v1(44.809,55.631) ; v1(67.5,54.38) 67.5,53.458 67.534,53.288 67.6,53.128 67.696,52.984 68.202,52.478 68.31,52.406 68.431,52.355 68.56,52.33 68.69,52.33 68.819,52.304 68.94,52.254 69.048,52.182 U1.B9@69.3,51.93
  Bottom Layer w0.125: v1(44.809,55.631) 51.071,55.631 51.241,55.597 51.402,55.531 51.546,55.435 52.354,54.626 52.498,54.53 52.659,54.464 52.829,54.43 54.37,54.43 54.59,54.521 54.758,54.689 54.978,54.78 66.884,54.78 67.029,54.763 67.153,54.712 67.252,54.627 v1@67.499,54.379
PIN2: U1.A10 U5.2 | length 25.4
  Top Layer w0.125: U5.2 46.709,56.271 46.868,56.138 47.039,56.021 47.229,55.943 47.462,55.9 47.689,55.88 51.539,55.88 51.727,55.802 v1@51.949,55.58 ; v1(68.05,54.38) 68.05,53.14 68.128,52.952 68.35,52.73 U1.A10@68.5,52.73
  Bottom Layer w0.125: v1@51.949,55.58 52.654,54.877 52.798,54.781 52.958,54.715 53.128,54.681 54.221,54.681 54.44,54.772 54.608,54.939 54.828,55.029 67.122,55.029 67.292,54.995 67.452,54.929 67.596,54.833 v1(68.05,54.38)
  other v1: 51.95,55.58
PIN3: U1.A11 U5.3 | length 22.4
  Top Layer w0.125: U5.3 49.019,56.501 49.18,56.364 49.35,56.242 49.543,56.168 49.781,56.142 50.012,56.129 51.673,56.129 51.843,56.095 52.004,56.029 52.148,55.933 v1(52.5,55.58) ; U1.A11@68.5,53.53 68.6,53.63 v1(68.6,54.38)
  Bottom Layer w0.125: v1(52.5,55.58) 52.954,55.127 53.098,55.03 53.258,54.964 53.428,54.93 54.07,54.93 54.29,55.021 54.459,55.19 54.679,55.281 67.421,55.281 67.591,55.247 67.752,55.18 67.896,55.084 v1(68.6,54.38)
PIN4: U1.B11 U5.4 | length 20.9
  Top Layer w0.125: U5.4 51.48,57.15 v1(53.05,55.58) ; U5.4@51.264,57.15 cw(c51.264,56.63) 51.632,56.998 ; v1(69.15,54.38) 69.15,53.68 U1.B11@69.3,53.53
  Bottom Layer w0.125: v1(53.05,55.58) 53.298,55.332 53.406,55.241 53.521,55.19 53.666,55.179 53.92,55.179 54.14,55.27 54.309,55.438 54.529,55.53 67.721,55.53 67.891,55.496 68.051,55.429 68.195,55.333 v1(69.15,54.38)
PIN5: U1.C9 U5.5 | length 20.9
  Top Layer w0.125: U5.5 53.45,55.73 v1(53.6,55.58) ; v1(69.7,54.38) 69.7,52.545 69.726,52.414 69.778,52.289 69.852,52.178 U1.C9
  Bottom Layer w0.125: v1(53.6,55.58) 53.976,55.58 54.101,55.633 54.198,55.729 54.324,55.781 68.023,55.781 68.193,55.747 68.353,55.681 68.498,55.584 v1(69.7,54.38)
PIN6: U1.C11 U5.6 | length 16.2
  Top Layer w0.125: U5.6 57.764,55.376 57.909,55.279 58.069,55.213 58.239,55.179 66.39,55.179 66.578,55.101 66.722,54.957 66.91,54.879 69.799,54.881 cw(c69.799,54.581) 70.099,54.581 70.099,54.331 U1.C11
PIN7: U1.D10 U5.7 | length 15
  Top Layer w0.125: U5.7 60.053,55.627 60.197,55.531 60.357,55.464 60.527,55.43 66.591,55.43 66.779,55.353 66.923,55.209 67.111,55.131 69.799,55.131 cw(c69.799,54.431) 70.499,54.431 70.499,54.331 70.501,53.344 70.527,53.213 70.578,53.089 70.653,52.977 U1.D10
PIN8: U1.D11 U5.8 | length 11.9
  Top Layer w0.125: U5.8 62.344,55.876 62.488,55.78 62.648,55.713 62.818,55.679 66.789,55.679 66.977,55.602 67.121,55.458 67.309,55.38 69.849,55.381 cw(c69.849,54.331) 70.9,54.331 U1.D11
PIN9: U1.E10 U5.9 | length 10.7
  Top Layer w0.125: U5.9 64.633,56.127 64.777,56.031 64.937,55.965 65.107,55.931 66.938,55.931 67.128,55.853 67.273,55.709 67.462,55.631 69.799,55.632 69.999,55.632 cw(c69.999,54.331) 71.3,54.331 71.301,53.344 71.327,53.213 71.378,53.089 71.453,52.977 U1.E10
PIN10: U1.E11
PIN11: U1.F10 U5.11 | length 6.3
  Top Layer w0.125: 72.101,54.152 72.101,53.344 72.127,53.213 72.179,53.089 72.253,52.977 U1.F10
  Top Layer w0.127: U5.11 69.346,56.494 ccw(c70.099,57.247) 70.099,56.182 cw(c70.099,55.336) 70.697,55.934 71.2,55.431 71.834,54.797 cw(c71.188,54.152) 72.101,54.152
PIN12: U1.F11 U5.12 | length 4.1
  Top Layer w0.125: U5.12 72.304,56.076 72.4,55.932 72.466,55.772 72.5,55.602 U1.F11
PIN13: U1.F9 U5.13 | length 5.7
  Top Layer w0.125: U1.F9 72.748,52.177 72.822,52.289 72.874,52.413 72.9,52.545 72.9,56.002 72.934,56.172 73,56.333 73.096,56.477 U5.13
PIN14: U1.G11 U5.14 | length 5.3
  Top Layer w0.125: U1.G11 73.3,53.731 76.31,56.739 U5.14 ; U5.14@76.157,56.586 ccw(c75.79,56.954) U5.14@76.31,56.954
PIN15: U1.G10 U5.15 | length 7.6
  Top Layer w0.125: U1.G10 73.547,52.977 73.621,53.089 73.673,53.213 73.699,53.344 73.699,53.532 73.729,53.683 73.788,53.826 73.874,53.955 75.854,55.933 75.998,56.029 76.159,56.095 76.329,56.129 77.551,56.129 77.721,56.163 77.881,56.229 78.025,56.325 U5.15
PIN16: U1.H11 U5.16 | length 8.9
  Top Layer w0.125: U1.H11 74.1,53.752 74.155,53.885 75.953,55.684 76.097,55.78 76.258,55.846 76.428,55.88 79.842,55.88 80.012,55.914 80.172,55.98 80.316,56.077 U5.16
PIN17: U1.H10 U5.17 | length 12
  Top Layer w0.125: U1.H10 74.378,53.009 74.462,53.134 74.52,53.274 74.55,53.422 74.55,53.651 74.583,53.822 74.65,53.982 74.746,54.126 76.053,55.435 76.197,55.531 76.357,55.597 76.527,55.631 82.133,55.631 82.303,55.665 82.463,55.731 82.607,55.828 U5.17
PIN18: U1.J11 U5.18 | length 13.2
  Top Layer w0.125: U1.J11 74.9,53.826 74.973,54.003 76.154,55.183 76.298,55.28 76.458,55.346 76.628,55.38 84.422,55.38 84.592,55.414 84.752,55.48 84.896,55.576 U5.18
PIN19: U1.J10 U5.19 | length 16.3
  Top Layer w0.125: U1.J10 75.147,52.977 75.221,53.089 75.273,53.213 75.299,53.344 75.299,53.702 75.333,53.872 75.399,54.033 75.495,54.177 76.253,54.934 76.397,55.031 76.557,55.097 76.727,55.131 86.713,55.131 86.883,55.165 87.043,55.231 87.187,55.327 U5.19
PIN20: U1.K11 U5.20 | length 17.6
  Top Layer w0.125: U1.K11 75.7,53.901 75.792,54.123 76.354,54.683 76.499,54.779 76.659,54.846 76.829,54.879 89.001,54.879 89.171,54.913 89.331,54.979 89.476,55.076 U5.20
PIN21: U1.L7 U5.21 | length 23.9
  Top Layer w0.125: U1.L7 v1(76.9,50.73) ; v1(94.1,55.13) U5.21@94.1,57.15
  Bottom Layer w0.125: v1@76.899,50.729 77.085,50.544 77.242,50.48 92.822,50.48 92.993,50.513 93.153,50.579 93.295,50.676 93.904,51.285 94.039,51.435 94.08,51.516 94.09,51.587 94.1,51.758 v1(94.1,55.13)
PIN22: U1.K7 U5.22 | length 26.5
  Top Layer w0.125: U1.K7 v1(76.1,50.73) ; v1(95.3,55.13) 96.63,56.46 U5.22 ; 96.478,56.308 ccw(c96.11,56.675) U5.22@96.63,56.675
  Bottom Layer w0.125: v1@76.099,50.729 76.409,50.421 76.549,50.328 76.704,50.264 76.868,50.231 92.923,50.231 93.093,50.265 93.253,50.331 93.397,50.428 95.102,52.133 95.199,52.277 95.265,52.437 95.299,52.607 v1@95.299,55.131
PIN23: U1.J7 U5.23 | length 28.4
  Top Layer w0.125: U1.J7 v1(75.3,50.73) ; v1(95.7,53.63) 99.17,57.1 U5.23
  Bottom Layer w0.125: v1@75.299,50.729 75.35,50.729 75.903,50.176 76.047,50.08 76.207,50.013 76.377,49.98 93.022,49.98 93.192,50.013 93.352,50.08 93.496,50.176 95.504,52.183 95.6,52.328 95.666,52.488 95.7,52.658 v1(95.7,53.63)
PIN24: U1.J8 U5.24 | length 32.3
  Top Layer w0.125: U1.J8 v1(75.3,51.53) ; v1(95.7,51.78) 101.07,57.15 U5.24 ; 100.918,56.998 cw(c101.285,56.63) U5.24@101.285,57.15
  Bottom Layer w0.125: v1@75.299,51.529 75.299,51.331 74.904,50.934 74.849,50.801 74.849,50.657 74.905,50.524 75.145,50.286 75.278,50.231 75.422,50.231 75.555,50.176 75.809,49.921 75.949,49.828 76.105,49.764 76.27,49.731 93.373,49.731 93.543,49.765 93.703,49.831 93.847,49.927 v1(95.7,51.78)
PIN25: U1.H7 U5.25 | length 35.1
  Top Layer w0.125: v1@73.699,51.529 73.699,51.161 73.79,50.94 74.045,50.685 74.1,50.552 U1.H7 ; v1(95.606,44.679) 98.079,44.679 98.249,44.645 98.409,44.579 98.553,44.482 100.48,42.555 100.625,42.459 100.785,42.393 100.955,42.359 U5.25@101.716,42.359
  Bottom Layer w0.125: v1@73.699,51.529 73.699,51.331 75.037,49.992 75.192,49.929 75.357,49.929 75.512,49.865 75.728,49.649 75.855,49.566 75.995,49.51 76.145,49.479 92.822,49.479 92.993,49.446 93.153,49.38 93.295,49.284 94.054,48.524 94.151,48.382 94.217,48.222 94.25,48.052 94.255,45.179 94.255,44.952 ; 94.256,44.952 94.307,44.828 94.403,44.731 94.528,44.678 v1(95.606,44.679)
  other v1: 73.7,51.53
PIN26: U1.G9 U5.26 | length 33.4
  Top Layer w0.125: U1.G9 73.4,51.93 v1(73.7,52.23) ; v1(95.6,43.58) 97.222,43.58 97.392,43.546 97.552,43.48 97.697,43.383 U5.26
  Bottom Layer w0.125: v1(73.7,52.23) 73.392,51.922 73.3,51.7 73.3,51.461 73.392,51.239 74.925,49.703 75.103,49.629 75.296,49.629 75.474,49.555 75.647,49.382 75.759,49.308 75.883,49.257 76.014,49.23 92.722,49.23 92.892,49.197 93.053,49.13 93.197,49.034 93.804,48.426 93.901,48.282 93.967,48.122 94.001,47.952 94.001,44.558 94.035,44.388 94.101,44.228 94.197,44.083 94.504,43.776 94.649,43.68 94.809,43.614 94.979,43.58 v1(95.6,43.58)
PIN27: U1.K6 U5.27 | length 27.3
  Top Layer w0.125: v1(75.3,49.13) U1.K6 ; v1(93.75,43.93) 95.573,42.107 95.717,42.01 95.878,41.944 96.048,41.91 U5.27
  Bottom Layer w0.125: v1@75.299,49.131 75.299,48.979 92.623,48.979 92.793,48.945 92.953,48.879 93.098,48.782 93.598,48.282 cw(c93.23,47.915) 93.75,47.915 ; 93.749,47.915 93.755,44.328 93.755,43.934 cw(c93.75,43.934) v1(93.75,43.93)
PIN28: U1.L5 U5.28 | length 22
  Top Layer w0.125: U1.L5 76.701,48.73 78.404,47.027 78.501,46.882 78.567,46.722 78.601,46.552 78.601,44.371 78.666,44.215 78.785,44.096 78.941,44.031 82.96,44.031 83.116,44.096 83.235,44.215 83.391,44.28 91.442,44.28 91.612,44.246 91.772,44.18 91.917,44.083 U5.28
PIN29: U1.K5 U5.29 | length 20.9
  Top Layer w0.125: U1.K5 75.947,48.483 76.059,48.409 76.182,48.357 76.314,48.331 76.501,48.331 76.653,48.301 76.796,48.242 76.925,48.156 78.153,46.927 78.249,46.783 78.316,46.623 78.349,46.453 78.349,44.397 78.376,44.265 78.427,44.14 78.502,44.028 78.598,43.932 78.71,43.857 78.835,43.806 78.967,43.78 83.058,43.78 83.215,43.845 83.336,43.966 83.494,44.031 89.723,44.031 89.893,43.997 90.053,43.931 90.197,43.834 91.55,42.479 U5.29 ; 91.398,42.631 cw(c91.029,42.264) U5.29@91.55,42.264
PIN30: R12.2 U1.J5 U5.30 | length 20.6
  Top Layer w0.125: U1.J5 v1(75.3,48.33) ; U5.30 89.033,41.933 R12.2
  Top Layer w0.127: R12.2 89.132,43.381 v1(89.65,43.38)
  Bottom Layer w0.125: v1@75.299,48.331 75.547,48.578 75.659,48.653 75.784,48.704 75.916,48.73 86.321,48.73 86.491,48.696 86.652,48.63 86.796,48.534 89.453,45.876 89.55,45.732 89.616,45.572 89.65,45.402 v1(89.65,43.38)
PIN31: R5.2 U1.J4 U5.31 | length 20.7
  Top Layer w0.125: U1.J4 v1(75.3,47.53) ; U5.31 86.483,41.923 R5.2
  Top Layer w0.127: R5.2 86.483,43.381 v1(87.1,43.38)
  Bottom Layer w0.125: v1@75.299,47.531 75.299,47.715 75.345,47.826 75.803,48.285 75.948,48.381 76.108,48.447 76.278,48.481 86.222,48.481 86.393,48.447 86.553,48.381 86.697,48.285 88.054,46.927 88.15,46.783 88.217,46.623 88.25,46.453 88.25,44.558 88.217,44.388 88.15,44.228 88.054,44.083 87.396,43.426 87.285,43.38 v1(87.1,43.38)
PIN32: U1.L3 U5.32 | length 10.9
  Top Layer w0.125: U1.L3 76.796,47.13 76.972,47.056 77.404,46.625 77.5,46.481 77.566,46.321 77.6,46.151 77.6,44.159 77.634,43.989 77.7,43.829 77.797,43.685 78.255,43.227 78.399,43.13 78.559,43.064 78.729,43.03 82.532,43.03 82.702,42.996 82.862,42.93 83.006,42.834 U5.32
PIN33: U1.K3 U5.33 | length 9.2
  Top Layer w0.125: U1.K3 75.901,47.13 76.148,46.883 76.259,46.808 76.383,46.757 76.515,46.731 76.734,46.731 76.866,46.705 76.99,46.653 77.102,46.578 77.197,46.483 77.271,46.371 77.323,46.246 77.349,46.114 77.349,44.057 77.383,43.887 77.449,43.727 77.545,43.583 78.153,42.975 78.297,42.879 78.457,42.813 78.627,42.779 80.241,42.779 80.411,42.745 80.571,42.679 80.715,42.583 U5.33
PIN34: U1.L2 U5.34 | length 5.5
  Top Layer w0.125: U1.L2 76.722,46.33 76.855,46.275 77.022,46.108 77.1,45.92 77.1,43.938 77.134,43.768 77.2,43.608 77.296,43.464 U5.34
PIN35: U1.J3 U5.35 | length 6.6
  Top Layer w0.125: U1.J3 75.15,46.88 75.259,46.807 75.38,46.757 75.509,46.731 75.758,46.731 75.915,46.666 76.054,46.525 76.099,46.415 76.099,46.295 76.145,46.185 76.295,46.034 76.428,45.979 76.577,45.979 76.702,45.928 76.799,45.833 76.851,45.708 76.851,42.729 76.817,42.559 76.751,42.399 76.654,42.255 U5.35
PIN36: U1.L1 U5.36 | length 4.7
  Top Layer w0.125: U5.36 76.304,44.444 76.4,44.588 76.467,44.748 76.5,44.918 U1.L1
PIN37: U1.D5 U5.37 | length 7
  Top Layer w0.125: U1.D5 70.9,48.529 71.147,48.282 71.222,48.17 71.274,48.046 71.3,47.915 71.3,42.68 U5.37@71.25,41.93
  Bottom Layer w0.125: U5.37@71.25,41.91 U5.37@71.25,41.93
PIN38: U1.A1 U5.38 | length 3.8
  Top Layer w0.125: U1.A1@68.5,45.53 68.5,41.91 U5.38
PIN39: U1.A2 U5.39 | length 5.6
  Top Layer w0.125: U5.39 67.404,43.164 67.5,43.308 67.566,43.468 67.6,43.638 67.6,45.716 67.626,45.847 67.678,45.971 67.752,46.083 67.907,46.238 68.129,46.33 U1.A2
PIN40: U1.B3 U5.40 | length 9
  Top Layer w0.125: U5.40 64.833,43.133 64.977,43.23 65.138,43.296 65.308,43.33 66.223,43.33 66.392,43.364 66.553,43.43 66.697,43.527 67.153,43.984 67.249,44.128 67.315,44.289 67.349,44.459 67.349,46.252 67.44,46.472 67.608,46.64 67.828,46.731 68.686,46.731 68.817,46.757 68.941,46.808 69.053,46.883 U1.B3
PIN41: U1.A3
PIN42: U1.B4 U5.42 | length 14.4
  Top Layer w0.125: U5.42 60.254,43.634 60.398,43.73 60.558,43.796 60.728,43.83 66.022,43.83 66.192,43.864 66.352,43.93 66.497,44.026 66.654,44.183 66.75,44.327 66.817,44.487 66.851,44.657 66.851,46.303 66.885,46.473 66.951,46.633 67.047,46.778 67.653,47.383 67.797,47.479 67.957,47.546 68.127,47.579 68.823,47.579 69.042,47.67 U1.B4
PIN43: U1.A4 U5.43 | length 16.1
  Top Layer w0.125: U5.43 57.963,43.883 58.107,43.979 58.267,44.045 58.437,44.079 65.985,44.079 66.117,44.106 66.241,44.157 66.353,44.232 66.447,44.328 66.522,44.44 66.573,44.564 66.599,44.696 66.599,46.402 66.633,46.572 66.7,46.733 66.796,46.877 67.674,47.755 67.802,47.841 67.945,47.9 68.097,47.93 U1.A4
PIN44: U1.A5 U5.44 | length 24.9
  Top Layer w0.125: U5.44 53.45,43.099 53.469,43.235 53.516,43.345 v1(53.75,43.58) ; v1(67.3,48.68) 68.45,48.68 U1.A5@68.5,48.73
  Bottom Layer w0.125: v1(53.75,43.58) 53.75,50.454 53.783,50.624 53.85,50.784 53.946,50.928 54.201,51.183 54.345,51.279 54.505,51.345 54.675,51.379 60.975,51.379 61.145,51.345 61.305,51.279 61.449,51.183 62.705,49.927 62.849,49.831 63.009,49.765 63.179,49.731 65.971,49.731 66.141,49.697 66.301,49.631 66.445,49.534 v1(67.3,48.68)
PIN45: U1.B5 U5.45 | length 28.7
  Top Layer w0.125: U5.45 51.53,41.91 v1(53.2,43.58) ; U5.45@51.315,41.91 ccw(c51.315,42.43) 51.682,42.062 ; U1.B5@69.3,48.73 69.35,48.73 v1(69.7,49.08)
  Bottom Layer w0.125: v1(53.2,43.58) 53.423,43.803 53.501,43.992 53.501,50.553 53.534,50.723 53.601,50.883 53.697,51.027 54.104,51.434 54.248,51.53 54.409,51.597 54.579,51.631 61.071,51.631 61.241,51.597 61.402,51.53 61.546,51.434 62.804,50.176 62.948,50.08 63.108,50.013 63.278,49.98 66.372,49.98 66.542,49.946 66.703,49.879 66.847,49.783 67.353,49.277 67.487,49.16 67.623,49.098 67.827,49.08 v1(69.7,49.08)
PIN46: U1.A6 U5.46 | length 28.9
  Top Layer w0.125: U5.46 49.117,42.657 49.26,42.776 49.412,42.88 49.584,42.944 49.802,42.968 50.011,42.979 51.542,42.979 51.724,42.998 51.903,43.034 52.071,43.098 52.226,43.188 52.368,43.298 v1(52.65,43.58) ; v1(67.7,49.48) 68.45,49.48 U1.A6@68.5,49.53
  Bottom Layer w0.125: v1(52.65,43.58) 53.053,43.982 53.149,44.126 53.215,44.286 53.249,44.456 53.249,50.649 53.283,50.819 53.349,50.979 53.446,51.124 54.005,51.683 54.149,51.779 54.31,51.846 54.48,51.88 61.173,51.88 61.343,51.846 61.503,51.779 61.647,51.683 62.903,50.428 63.047,50.331 63.207,50.265 63.377,50.231 66.672,50.231 66.842,50.197 67.002,50.131 67.146,50.034 v1@67.699,49.479
PIN47: U1.A7 U5.47 | length 31.2
  Top Layer w0.125: U5.47 46.787,42.868 46.936,42.991 47.095,43.099 47.272,43.173 47.477,43.212 47.68,43.231 51.293,43.231 51.585,43.252 51.707,43.283 51.822,43.334 51.926,43.405 v1(52.1,43.58) ; v1(67.5,50.38) 67.55,50.33 U1.A7@68.5,50.33
  Bottom Layer w0.125: v1(52.1,43.58) 52.804,44.284 52.9,44.428 52.966,44.588 53,44.758 53,50.753 53.034,50.923 53.1,51.084 53.197,51.228 53.904,51.935 54.048,52.031 54.208,52.097 54.378,52.131 61.272,52.131 61.442,52.097 61.602,52.031 61.746,51.935 63.004,50.677 63.149,50.58 63.309,50.514 63.479,50.48 67.4,50.48 v1@67.499,50.381
PIN48: U1.B7 U5.48 | length 34.6
  Top Layer w0.125: U5.48 44.422,43.042 44.601,43.189 44.797,43.321 44.999,43.408 45.214,43.456 45.433,43.48 50.884,43.48 51.09,43.503 51.297,43.552 51.479,43.622 51.649,43.717 51.805,43.834 v1(52.1,44.13) ; v1(67.9,50.78) 68.308,50.78 68.456,50.75 68.596,50.692 68.722,50.608 68.945,50.385 69.078,50.33 U1.B7
  Bottom Layer w0.125: v1(52.1,44.13) 52.52,44.549 52.689,44.718 52.749,44.862 52.749,45.42 52.749,50.852 52.783,51.022 52.849,51.183 52.945,51.327 53.802,52.183 53.946,52.28 54.106,52.346 54.276,52.38 61.371,52.38 61.541,52.346 61.701,52.28 61.845,52.183 63.053,50.976 63.197,50.88 63.357,50.814 63.527,50.78 v1(67.9,50.78)
R5_1: R5.1 U1.K4 | length 13.6
  Top Layer w0.125: U1.K4 76.099,47.531 76.15,47.531 76.582,47.531 76.745,47.499 76.898,47.435 77.037,47.343 77.653,46.727 77.749,46.583 77.815,46.422 77.849,46.252 77.849,44.258 77.883,44.088 77.949,43.928 78.046,43.784 78.354,43.476 78.498,43.379 78.658,43.313 78.828,43.279 83.351,43.279 R5.1@85.616,43.279 ; 75.946,47.683 ccw(c76.314,48.051) 76.314,47.531
R12_1: R12.1 U1.L4 | length 15.1
  Top Layer w0.125: U1.L4 76.722,47.93 76.855,47.875 77.904,46.826 78,46.682 78.067,46.522 78.101,46.352 78.101,44.357 78.134,44.187 78.201,44.027 78.297,43.883 78.453,43.727 78.597,43.631 78.757,43.564 78.927,43.531 83.158,43.531 83.314,43.595 83.433,43.715 83.59,43.78 87.396,43.78 87.562,43.747 87.717,43.682 87.857,43.589 R12.1
S$568448: 
S$631102: 
SPI_HOLD: R9.2 U3.7 | length 5.2
  Top Layer w0.125: U3.7@55.464,51.943 55.464,52.278 55.547,52.478 55.953,52.885 56.098,52.981 56.258,53.047 56.428,53.081 58.338,53.081 58.508,53.047 58.669,52.981 58.813,52.885 R9.2@59.599,52.098
SPI_WP: R8.2 U3.3 | length 1.8
  Top Layer w0.125: U3.3@56.734,47.117 56.734,45.38 R8.2
U1_G8: U1.G8
USER0: J1.9 U1.A9 | length 22.6
  Top Layer w0.125: J1.9 49.155,53.825 49.265,53.736 49.383,53.66 49.514,53.612 49.678,53.589 49.836,53.579 54.023,53.579 54.193,53.613 54.353,53.679 54.497,53.775 v1(55.1,54.38) ; v1(66.95,54.38) 66.95,53.558 66.984,53.388 67.05,53.228 67.146,53.083 68.3,51.93 U1.A9@68.5,51.93
  Bottom Layer w0.125: v1(55.1,54.38) 55.25,54.53 66.8,54.53 v1(66.95,54.38)
USER1: J1.10 U1.B8 | length 21.4
  Top Layer w0.125: J1.10 51.442,54.078 51.56,53.979 51.684,53.893 51.826,53.844 52.068,53.83 53.573,53.83 53.743,53.864 53.904,53.93 54.048,54.027 54.755,54.734 54.899,54.83 55.059,54.896 55.229,54.93 66.226,54.93 66.352,54.878 66.448,54.782 66.5,54.656 66.5,53.557 66.534,53.387 66.601,53.227 66.697,53.083 68.024,51.755 68.153,51.669 68.296,51.61 68.447,51.58 68.608,51.58 68.756,51.55 68.896,51.493 69.021,51.409 U1.B8
VCCPLL0: C5.2 C13.2 R2.2 U1.J6 | length 7.2
  Top Layer w0.125: U1.J6 75.149,49.777 75.261,49.851 75.385,49.903 75.517,49.929 77.023,49.929 77.193,49.963 77.353,50.029 77.497,50.126 77.849,50.479 77.993,50.575 78.153,50.642 78.323,50.676 C5.2 79.111,50.564 R2.2
VCCPLL1: C6.2 C14.2 R7.2 U1.C6 | length 10.8
  Top Layer w0.203: C6.2 63.089,49.863 63.249,49.929 69.486,49.929 69.617,49.903 69.741,49.851 69.853,49.777 U1.C6
  Top Layer w0.305: 61.751,50.107 ccw(c62.182,50.107) 62.182,49.675 ; R7.2 C14.2@61.751,49.726 ; C6.2 C14.2@61.751,49.675 ; C14.2@61.751,49.675 C14.2@61.751,49.726 ; C14.2@61.751,49.675 C14.2 C14.2@61.751,49.726
pads on no net: U1.B10

## Polygon pours and split planes (outlines as drawn)
+5.0VDC on Bottom Layer (solid): 39.2,39.53 39.2,43.13 96.1,43.13 96.1,55.93 38.8,55.93 38.8,59.53 105.6,59.53 105.6,39.53
GND on Bottom Layer (solid): 38.1,55.93 38.1,43.13 96.1,43.13 96.1,55.93 38.9,55.93
GND on Top Layer (solid): 39.48,59.69 39.48,38.1 105.52,38.1 105.52,59.69 39.48,59.69

## Silkscreen, mask and mechanical layers (free items; w line width, h text height)
Bottom Overlay:
  text "u0" at 46.7,53.565 h0.89
  text "u1" at 53.381,53.505 h0.89
  text "a" at 84.753,51.836 h0.89
  text "3v" at 46.754,51.029 h0.89 r7
  text "SO" at 53.948,51.025 h0.89
  text "b" at 84.753,50.636 h0.89
  text "BP8361" at 81.4,50.13 h5
  text "SI" at 52.855,48.93 h0.89 r270
  text "Gnd" at 46.7,48.485 h0.89
  text "WILLOE   v0.8" at 82.252,48.03 h2.5
  text "(c) 2023" at 73.902,46.248 h2.03
  text "Rst" at 46.7,45.945 h0.89
  text "Sck" at 54.496,45.945 h0.89
  text "Done" at 46.754,43.409 h0.89 r7
  text "Ss" at 53.769,43.406 h0.89 r3
Document:
  lines w0.125 net S$631102: 47.1,58.42 97.9,58.42 97.9,40.64 ; 47.1,40.64 97.9,40.64 97.9,58.42 47.1,58.42 47.1,40.64
  text "PIN 1" at 42.397,55.969 h0.8 r90
  text "PIN 48" at 42.396,40.306 h0.8 r90